# EAGLE board psu_rail (EAGLE 7.4.0)
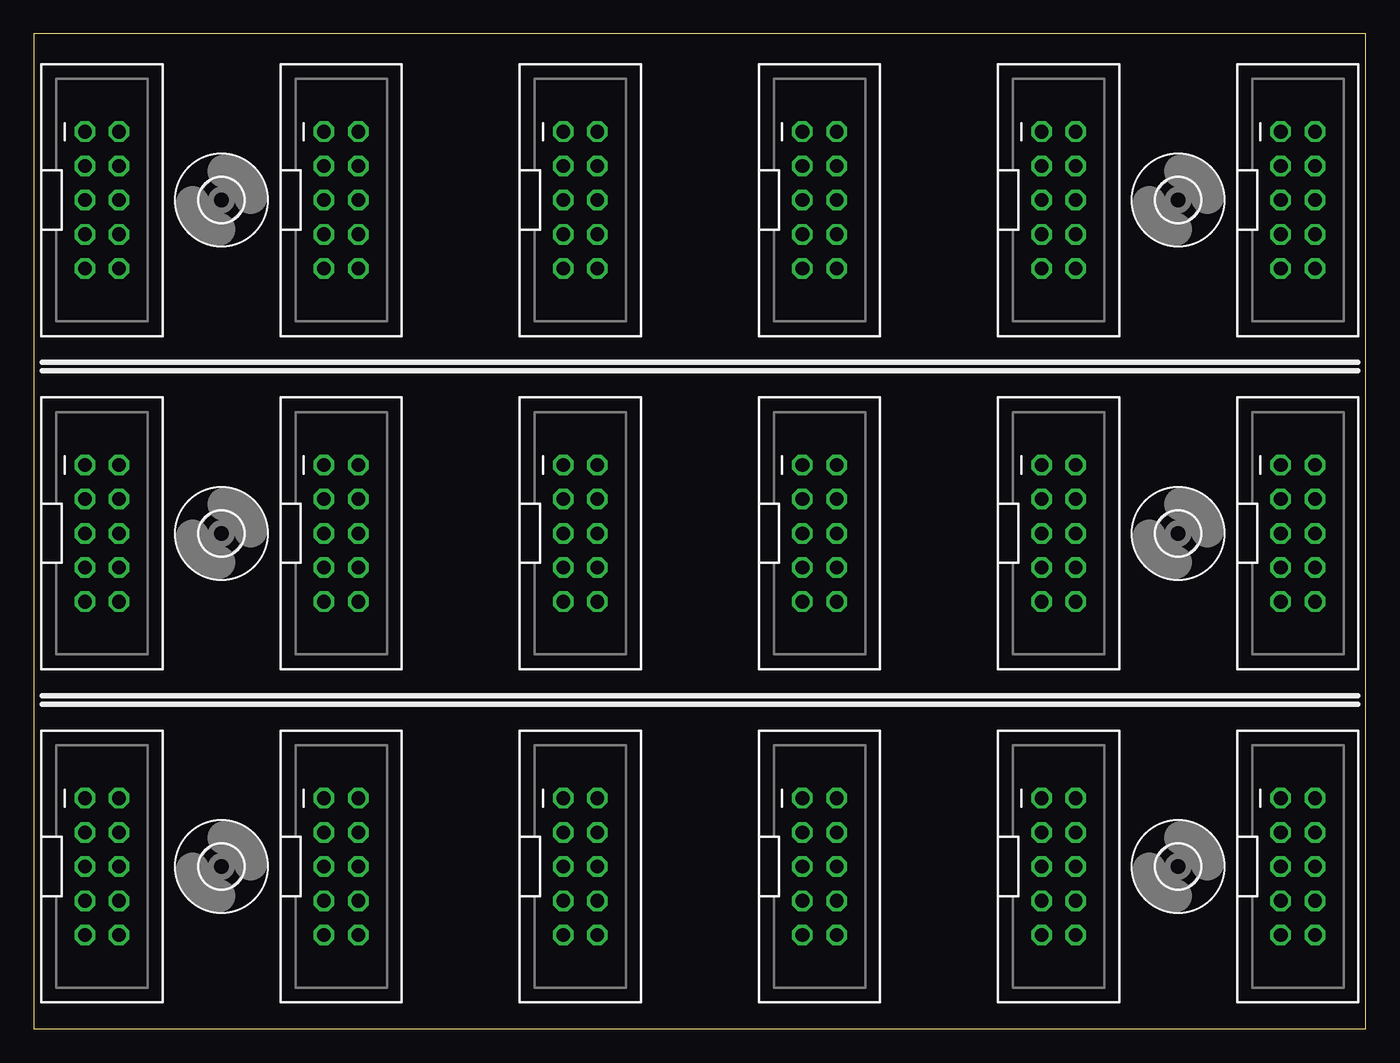
[diagram p0: board, top side]
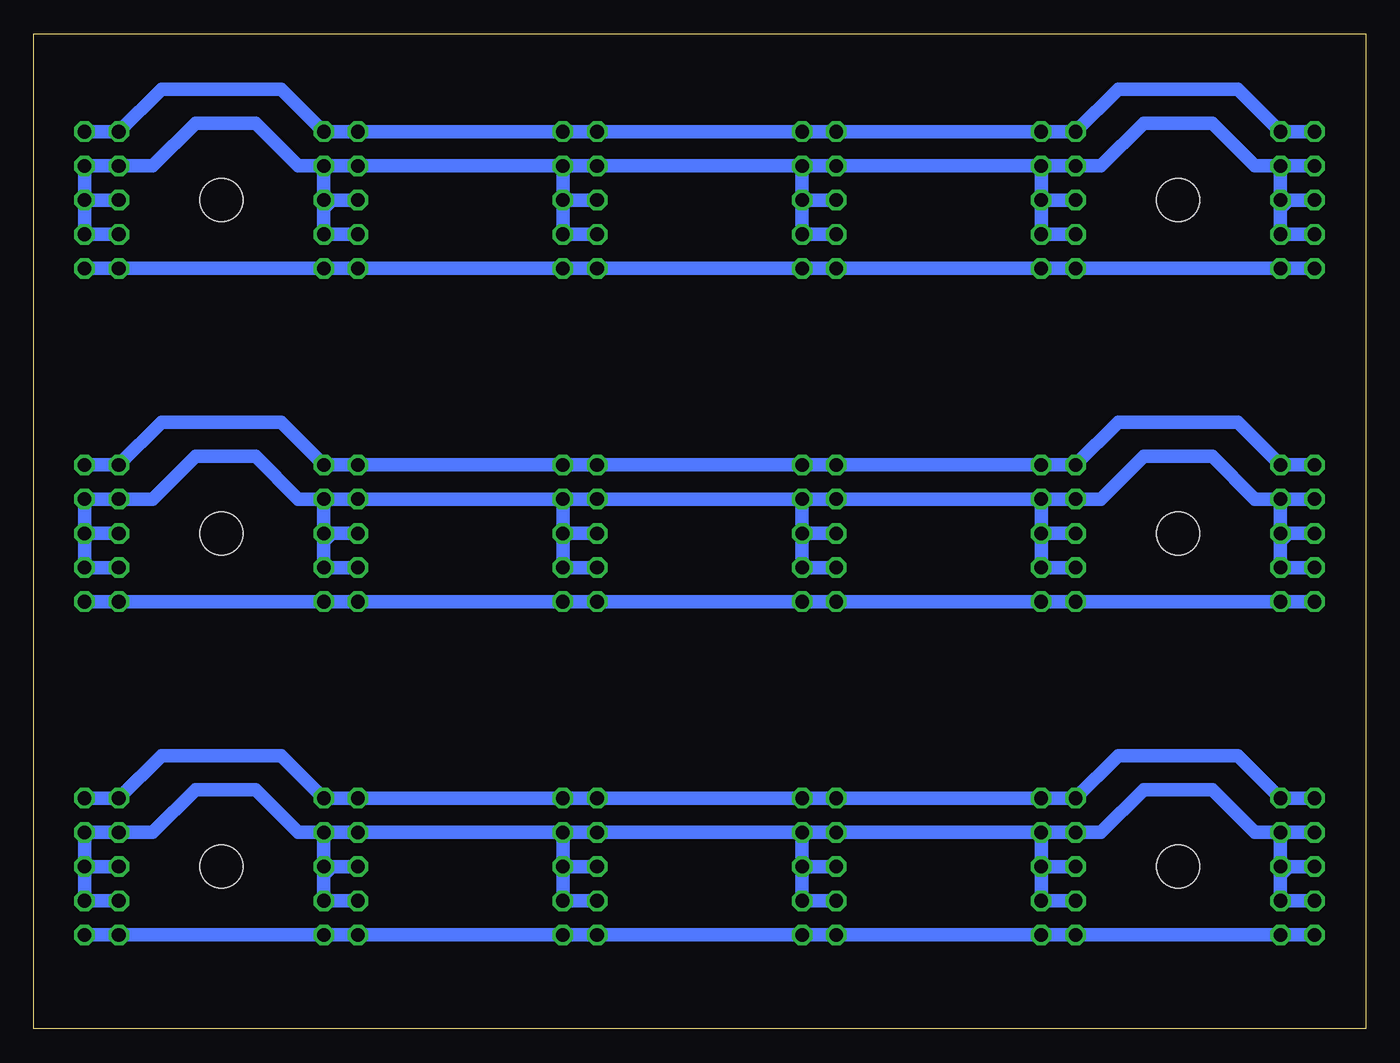
[diagram p1: board, bottom side, seen from below]

Size 99.04 x 73.97 mm. Coordinates in mm from the lower left corner, seen from the top.
Outline: 0,0 99.04,0 99.04,73.97 0,73.97 0,0
Copper layers (1*16): Top 0.035mm / dielectric 1.5mm / Bottom 0.035mm
Design rules "default": minimum track width 10mil, minimum drill 24mil, track to track 8mil, track to pad 8mil, pad to pad 8mil, via to via 8mil, smd to smd 8mil, copper to edge 40mil, drill to drill 8mil, minimum pad ring 10mil, minimum via ring 8mil, stop-mask expansion 4mil, vias tented up to drill 0mil, thermal gap 10mil

## Footprints (pad centres in the part's own frame; a part is rotated, then mirrored left to right if it is on the bottom)
2X5-SHROUDED = drill 1.016 octagon: 1 -1.27,5.08; 2 1.27,5.08; 3 -1.27,2.54; 4 1.27,2.54; 5 -1.27,0; 6 1.27,0; 7 -1.27,-2.54; 8 1.27,-2.54; 9 -1.27,-5.08; 10 1.27,-5.08
3,2 = hole 3.2: 0,0

## Placement (x,y rotation side)
JP1  M05X2SHD  [2X5-SHROUDED]  5.08,36.83 0 top
JP2  M05X2SHD  [2X5-SHROUDED]  22.86,36.83 0 top
JP3  M05X2SHD  [2X5-SHROUDED]  40.64,36.83 0 top
JP4  M05X2SHD  [2X5-SHROUDED]  58.42,36.83 0 top
JP5  M05X2SHD  [2X5-SHROUDED]  5.08,61.59 0 top
JP6  M05X2SHD  [2X5-SHROUDED]  22.86,61.59 0 top
JP7  M05X2SHD  [2X5-SHROUDED]  40.64,61.59 0 top
JP8  M05X2SHD  [2X5-SHROUDED]  58.42,61.59 0 top
JP9  M05X2SHD  [2X5-SHROUDED]  76.2,61.59 0 top
JP10  M05X2SHD  [2X5-SHROUDED]  93.98,61.59 0 top
JP11  M05X2SHD  [2X5-SHROUDED]  76.2,36.83 0 top
JP12  M05X2SHD  [2X5-SHROUDED]  93.98,36.83 0 top
JP13  M05X2SHD  [2X5-SHROUDED]  5.08,12.06 0 top
JP14  M05X2SHD  [2X5-SHROUDED]  22.86,12.06 0 top
JP15  M05X2SHD  [2X5-SHROUDED]  40.64,12.06 0 top
JP16  M05X2SHD  [2X5-SHROUDED]  58.42,12.06 0 top
JP17  M05X2SHD  [2X5-SHROUDED]  76.2,12.06 0 top
JP18  M05X2SHD  [2X5-SHROUDED]  93.98,12.06 0 top
U$1  [3,2]  13.97,12.06 0 top
U$2  [3,2]  85.09,12.06 0 top
U$3  [3,2]  13.97,36.83 0 top
U$4  [3,2]  85.09,36.83 0 top
U$6  [3,2]  13.97,61.59 0 top
U$8  [3,2]  85.09,61.59 0 top

## Library data of the parts
JP1-JP18 = SparkFun
U$1-U$4 U$6 U$8 = holes

## Nets
N$1: JP1.1 JP1.2 JP2.1 JP2.2 JP3.1 JP3.2 JP4.1 JP4.2 JP11.1 JP11.2 JP12.1 JP12.2
N$2: JP1.9 JP1.10 JP2.9 JP2.10 JP3.9 JP3.10 JP4.9 JP4.10 JP11.9 JP11.10 JP12.9 JP12.10
N$3: JP1.3 JP1.4 JP1.5 JP1.6 JP1.7 JP1.8 JP2.3 JP2.4 JP2.5 JP2.6 JP2.7 JP2.8 JP3.3 JP3.4 JP3.5 JP3.6 JP3.7 JP3.8 JP4.3 JP4.4 JP4.5 JP4.6 JP4.7 JP4.8 JP11.3 JP11.4 JP11.5 JP11.6 JP11.7 JP11.8 JP12.3 JP12.4 JP12.5 JP12.6 JP12.7 JP12.8
N$4: JP13.1 JP13.2 JP14.1 JP14.2 JP15.1 JP15.2 JP16.1 JP16.2 JP17.1 JP17.2 JP18.1 JP18.2
N$5: JP13.9 JP13.10 JP14.9 JP14.10 JP15.9 JP15.10 JP16.9 JP16.10 JP17.9 JP17.10 JP18.9 JP18.10
N$6: JP13.3 JP13.4 JP13.5 JP13.6 JP13.7 JP13.8 JP14.3 JP14.4 JP14.5 JP14.6 JP14.7 JP14.8 JP15.3 JP15.4 JP15.5 JP15.6 JP15.7 JP15.8 JP16.3 JP16.4 JP16.5 JP16.6 JP16.7 JP16.8 JP17.3 JP17.4 JP17.5 JP17.6 JP17.7 JP17.8 JP18.3 JP18.4 JP18.5 JP18.6 JP18.7 JP18.8
N$7: JP5.1 JP5.2 JP6.1 JP6.2 JP7.1 JP7.2 JP8.1 JP8.2 JP9.1 JP9.2 JP10.1 JP10.2
N$8: JP5.9 JP5.10 JP6.9 JP6.10 JP7.9 JP7.10 JP8.9 JP8.10 JP9.9 JP9.10 JP10.9 JP10.10
N$9: JP5.3 JP5.4 JP5.5 JP5.6 JP5.7 JP5.8 JP6.3 JP6.4 JP6.5 JP6.6 JP6.7 JP6.8 JP7.3 JP7.4 JP7.5 JP7.6 JP7.7 JP7.8 JP8.3 JP8.4 JP8.5 JP8.6 JP8.7 JP8.8 JP9.3 JP9.4 JP9.5 JP9.6 JP9.7 JP9.8 JP10.3 JP10.4 JP10.5 JP10.6 JP10.7 JP10.8

## Tracks (layer width: path | path; a pad name or v marks a point on that pad's centre or on a via)
N$1
  Bottom 1.016: JP1.1 JP1.2 9.53,45.09 18.41,45.09 JP2.1 JP2.2 JP3.1 JP3.2 JP4.1 JP4.2 JP11.1 JP11.2 80.64,45.09 89.53,45.09 JP12.1 JP12.2
N$2
  Bottom 1.016: JP1.9 JP1.10 JP2.9 JP2.10 JP3.9 JP3.10 JP4.9 JP4.10 JP11.9 JP11.10 JP12.9 JP12.10
N$3
  Bottom 1.016: JP1.3 JP1.4 | JP1.4 8.26,39.37 11.43,42.55 16.51,42.55 19.68,39.37 JP2.3 JP2.4 | JP2.4 JP3.3 JP3.4 | JP3.4 JP4.3 JP4.4 | JP4.4 JP11.3 JP11.4 | JP1.4 JP1.6 6.35,36.2 | 6.35,36.2 JP1.8 JP1.7 | JP2.4 JP2.6 | JP2.6 JP2.8 JP2.7 | JP3.4 JP3.6 | JP3.6 JP3.8 JP3.7 | JP4.4 JP4.6 | JP4.6 JP4.8 JP4.7 | JP11.4 JP11.6 77.47,36.2 | 77.47,36.2 JP11.8 JP11.7 | JP11.4 79.38,39.37 82.55,42.55 87,42.55 90.17,39.37 JP12.3 JP12.4 JP12.6 | JP12.6 JP12.8 JP12.7 | JP12.5 JP12.6 | JP11.5 76.83,36.83 77.47,36.2 | JP4.5 JP4.6 | JP3.5 JP3.6 | JP2.5 JP2.6 | JP1.5 5.71,36.83 6.35,36.2
N$4
  Bottom 1.016: JP13.1 JP13.2 9.53,20.32 18.41,20.32 JP14.1 JP14.2 JP15.1 JP15.2 JP16.1 JP16.2 JP17.1 JP17.2 80.64,20.32 89.53,20.32 JP18.1 JP18.2
N$5
  Bottom 1.016: JP13.9 JP13.10 JP14.9 JP14.10 JP15.9 JP15.10 JP16.9 JP16.10 JP17.9 JP17.10 JP18.9 JP18.10
N$6
  Bottom 1.016: JP13.3 JP13.4 | JP13.4 8.26,14.61 11.43,17.78 16.51,17.78 19.68,14.61 JP14.3 JP14.4 | JP14.4 JP15.3 JP15.4 | JP15.4 JP16.3 JP16.4 | JP16.4 JP17.3 JP17.4 | JP13.4 JP13.6 6.35,11.43 | 6.35,11.43 JP13.8 JP13.7 | JP14.4 JP14.6 | JP14.6 JP14.8 JP14.7 | JP15.4 JP15.6 | JP15.6 JP15.8 JP15.7 | JP16.4 JP16.6 | JP16.6 JP16.8 JP16.7 | JP17.4 JP17.6 77.47,11.43 | 77.47,11.43 JP17.8 JP17.7 | JP17.4 79.38,14.61 82.55,17.78 87,17.78 90.17,14.61 JP18.3 JP18.4 JP18.6 | JP18.6 JP18.8 JP18.7 | JP18.5 JP18.6 | JP17.5 76.83,12.06 77.47,11.43 | JP16.5 JP16.6 | JP15.5 JP15.6 | JP14.5 JP14.6 | JP13.5 5.71,12.06 6.35,11.43
N$7
  Bottom 1.016: JP5.1 JP5.2 9.53,69.85 18.41,69.85 JP6.1 JP6.2 JP7.1 JP7.2 JP8.1 JP8.2 JP9.1 JP9.2 80.64,69.85 89.53,69.85 JP10.1 JP10.2
N$8
  Bottom 1.016: JP5.9 JP5.10 JP6.9 JP6.10 JP7.9 JP7.10 JP8.9 JP8.10 JP9.9 JP9.10 JP10.9 JP10.10
N$9
  Bottom 1.016: JP5.3 JP5.4 | JP5.4 8.26,64.14 11.43,67.31 16.51,67.31 19.68,64.14 JP6.3 JP6.4 | JP6.4 JP7.3 JP7.4 | JP7.4 JP8.3 JP8.4 | JP8.4 JP9.3 JP9.4 | JP5.4 JP5.6 6.35,60.96 | 6.35,60.96 JP5.8 JP5.7 | JP6.4 JP6.6 | JP6.6 JP6.8 JP6.7 | JP7.4 JP7.6 | JP7.6 JP7.8 JP7.7 | JP8.4 JP8.6 | JP8.6 JP8.8 JP8.7 | JP9.4 JP9.6 77.47,60.96 | 77.47,60.96 JP9.8 JP9.7 | JP9.4 79.38,64.14 82.55,67.31 87,67.31 90.17,64.14 JP10.3 JP10.4 JP10.6 | JP10.6 JP10.8 JP10.7 | JP10.5 JP10.6 | JP9.5 76.83,61.59 77.47,60.96 | JP8.5 JP8.6 | JP7.5 JP7.6 | JP6.5 JP6.6 | JP5.5 5.71,61.59 6.35,60.96